# Altium PCB USBHub3.2G1.PcbDoc
Units mm, origin at the board's own origin, x right, y up, seen from the top; angles counter-clockwise.
Board outline 130 x 25 mm, 2 copper layers (Top Layer, Bottom Layer), stack 1.4 mm thick; 147 components, 69 nets, 513 pads, 0 vias.
Unrouted connection lines stored in the file: 357.
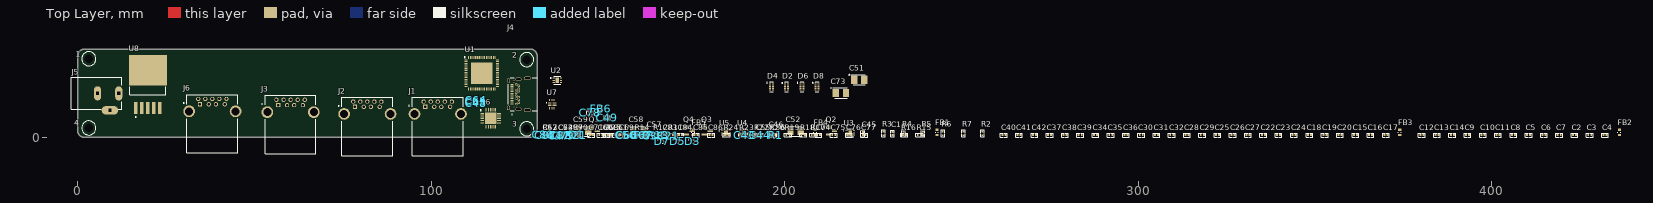
[diagram p0: Top Layer view]
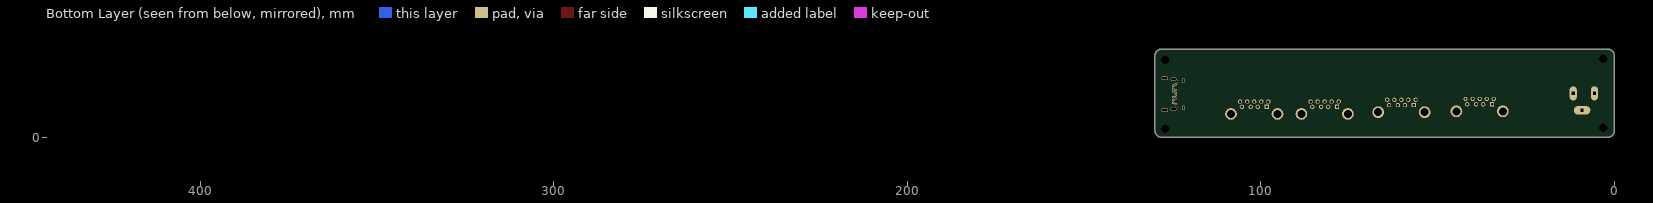
[diagram p1: Bottom Layer view, seen from below]

## Layer stack, top to bottom
Top Solder: solder mask 0.0254, SM-002, Dk 4
Top Layer: signal copper 0.035
Dielectric 1: dielectric 1.33, FR-4, Dk 4.8
Bottom Layer: signal copper 0.035
Bottom Solder: solder mask 0.0254, SM-002, Dk 4

## Board outline
0,2 0,23 cw(c2,23) 2,25 128,25 cw(c128,23) 130,23 130,2 cw(c128,2) 128,0 2,0 cw(c2,2)

## Design rules (kind name [scope] priority, off if disabled: settings)
Clearance [All] p1: gap=0.254 ignorepadtopadclearanceinfootprint=FALSE
PolygonConnect [All] p1: connectstyle=Relief reliefconductorwidth=0.254 reliefentries=4 polygonreliefangle="90 Angle" airgapwidth=0.254
RoutingVias [All] p1: holewidth=0.711 width=1.27 viastyle="Through Hole" minholewidth=0.711 minwidth=1.27 maxholewidth=0.711 maxwidth=1.27
SolderMaskExpansion [All] p1: expansion=0.102 istentingtop=FALSE
SupplyNets "Schematic Supply Nets_10" [InNet('DN3_VBUS')] p1: voltage=0.000
SupplyNets "Schematic Supply Nets_9" [InNet('DN2_VBUS')] p2: voltage=0.000
SupplyNets "Schematic Supply Nets_8" [InNet('DN4_VBUS')] p3: voltage=0.000
SupplyNets "Schematic Supply Nets_7" [InNet('5V0_EXT')] p4: voltage=0.000
SupplyNets "Schematic Supply Nets_6" [InNet('5V0')] p5: voltage=0.000
SupplyNets "Schematic Supply Nets_5" [InNet('UPS_VBUS')] p6: voltage=0.000
SupplyNets "Schematic Supply Nets_4" [InNet('DN1_VBUS')] p7: voltage=0.000
SupplyNets "Schematic Supply Nets_3" [InNet('3V3')] p8: voltage=0.000
SupplyNets "Schematic Supply Nets_2" [InNet('1V1')] p9: voltage=0.000
SupplyNets "Schematic Supply Nets_1" [InNet('GND')] p10: voltage=0.000
SupplyNets "Schematic Supply Nets" [InNet('SGND')] p11: voltage=0.000
Width [All] p1: maxlimit=0.254 minlimit=0.254 preferedwidth=0.254
30 further rules are at their usual default settings.

## Classes and differential pairs
component class Schematic: 2 3 4 C1 C39 C40 C41 C42 C43 C44 C45 C46 C47 C48 C49 C50 C51 C52 C53 C54 C55 C56 C57 C58 C59 C60 C61 C62 C63 C64 C65 C66 C67 C68 C69 C70 C71 C72 C73 C74 C75 C76 C77 C78 C79 C80 C81 C82 C83 C84 C85 C86 D1 D2 D3 D4 D5 D6 D7 D8 FB1 FB4 FB5 FB6 J1 J2 J3 J5 J6 Q1 Q2 Q3 Q4 R1 R6 R9 R13 R14 R15 R16 R19 R21 R22 R23 R24 R25 U1 U2 U6 U7 U8

## Components (designator, comment, footprint, x,y, rotation, side; value= is the part's Value field where it differs from the comment)
1 "Furo" FURO_M2 3.177,22.245 r0 top
2 "Furo" FURO_M2 127.054,21.997 r0 top
3 "Furo" FURO_M2 127.054,2.426 r0 top
4 "Furo" FURO_M2 3.177,2.672 r0 top
C1 "CAPNPOL" 0402 230.555,1.156 r90 top value="100 nF"
C2 "CAPNPOL" 0402 423.468,0.648 r0 top value="1 nF"
C3 "CAPNPOL" 0402 427.786,0.648 r0 top value="10 nF"
C4 "CAPNPOL" 0402 432.104,0.648 r0 top value="100 nF"
C5 "CAPNPOL" 0402 410.514,0.648 r0 top value="1 nF"
C6 "CAPNPOL" 0402 414.832,0.648 r0 top value="10 nF"
C7 "CAPNPOL" 0402 419.15,0.648 r0 top value="100 nF"
C8 "CAPNPOL" 0402 406.196,0.648 r0 top value="1 uF"
C9 "CAPNPOL" 0402 393.242,0.648 r0 top value="1 nF"
C10 "CAPNPOL" 0402 397.56,0.648 r0 top value="10 nF"
C11 "CAPNPOL" 0402 401.878,0.648 r0 top value="100 nF"
C12 "CAPNPOL" 0402 380.288,0.648 r0 top value="1 nF"
C13 "CAPNPOL" 0402 384.606,0.648 r0 top value="10 nF"
C14 "CAPNPOL" 0402 388.924,0.648 r0 top value="100 nF"
C15 "CAPNPOL" 0402 361.492,0.648 r0 top value="1 nF"
C16 "CAPNPOL" 0402 365.81,0.648 r0 top value="10 nF"
C17 "CAPNPOL" 0402 370.128,0.648 r0 top value="100 nF"
C18 "CAPNPOL" 0402 348.538,0.648 r0 top value="1 nF"
C19 "CAPNPOL" 0402 352.856,0.648 r0 top value="10 nF"
C20 "CAPNPOL" 0402 357.174,0.648 r0 top value="100 nF"
C21 "CAPNPOL" 0201 167.309,0.521 r0 top value="100 nF"
C22 "CAPNPOL" 0402 335.457,0.648 r0 top value="1 nF"
C23 "CAPNPOL" 0402 339.775,0.648 r0 top value="10 nF"
C24 "CAPNPOL" 0402 344.093,0.648 r0 top value="100 nF"
C25 "CAPNPOL" 0402 322.503,0.648 r0 top value="1 nF"
C26 "CAPNPOL" 0402 326.821,0.648 r0 top value="10 nF"
C27 "CAPNPOL" 0402 331.139,0.648 r0 top value="100 nF"
C28 "CAPNPOL" 0402 313.867,0.648 r0 top value="10 uF"
C29 "CAPNPOL" 0402 318.185,0.648 r0 top value="10 uF"
C30 "CAPNPOL" 0402 300.913,0.648 r0 top value="1 nF"
C31 "CAPNPOL" 0402 305.231,0.648 r0 top value="10 nF"
C32 "CAPNPOL" 0402 309.549,0.648 r0 top value="100 nF"
C33 "CAPNPOL" 0201 162.991,0.521 r0 top value="100 nF"
C34 "CAPNPOL" 0402 287.959,0.648 r0 top value="1 nF"
C35 "CAPNPOL" 0402 292.277,0.648 r0 top value="10 nF"
C36 "CAPNPOL" 0402 296.595,0.648 r0 top value="100 nF"
C37 "CAPNPOL" 0402 275.005,0.648 r0 top value="1 nF"
C38 "CAPNPOL" 0402 279.323,0.648 r0 top value="10 nF"
C39 "CAPNPOL" 0402 283.641,0.648 r0 top value="100 nF"
C40 "CAPNPOL" 0402 262.051,0.648 r0 top value="1 nF"
C41 "CAPNPOL" 0402 266.369,0.648 r0 top value="10 nF"
C42 "CAPNPOL" 0402 270.687,0.648 r0 top value="100 nF"
C43 "CAPNPOL" 0402 188.772,0.648 r0 top value="100 nF"
C44 "CAPNPOL" 0402 193.09,0.648 r0 top value="1 nF"
C45 "CAPNPOL" 0402 222.173,1.156 r90 top value="1 uF"
C46 "CAPNPOL" 0402 195.884,1.156 r90 top value="100 nF"
C47 "CAPNPOL" 0201 136.321,0.521 r0 top value="100 nF"
C48 "CAPNPOL" 0201 112.834,9.652 r0 top value="100 nF"
C49 "CAPNPOL" 0402 149.862,5.587 r0 top value="100 nF"
C50 "CAPNPOL" 0402 155.244,0.648 r0 top value="1 nF"
C51 "CAPPOL" TCJB157M006R0070 221.12,16.332 r0 top value="150 uF"
C52 "CAPPOL" TCJB157M006R0070 203.123,1.791 r0 top value="150 uF"
C53 "CAPNPOL" 0402 132.384,0.648 r0 top value="100 nF"
C54 "CAPNPOL" 0402 136.702,0.648 r0 top value="100 nF"
C55 "CAPNPOL" 0402 192.582,0.648 r0 top value="100 nF"
C56 "CAPNPOL" 0402 196.9,0.648 r0 top value="100 nF"
C57 "CAPNPOL" 0402 161.34,1.156 r90 top value="100 nF"
C58 "CAPPOL" TCJB157M006R0070 158.673,1.791 r0 top value="150 uF"
C59 "CAPPOL" TCJB157M006R0070 143.052,1.791 r0 top value="150 uF"
C60 "CAPNPOL" 0402 148.005,0.648 r0 top value="100 nF"
C61 "CAPNPOL" 0402 152.323,0.648 r0 top value="100 nF"
C62 "CAPNPOL" 0402 132.384,0.648 r0 top value="100 nF"
C63 "CAPNPOL" 0402 136.702,0.648 r0 top value="100 nF"
C64 "CAPNPOL" 0201 112.856,10.579 r180 top value="100 nF"
C65 "CAPNPOL" 0201 112.856,10.12 r180 top value="100 nF"
C66 "CAPNPOL" 0402 155.498,0.648 r0 top value="100 nF"
C67 "CAPNPOL" 0402 159.816,0.648 r0 top value="1 nF"
C68 "CAPNPOL" 0402 149.656,0.648 r0 top value="10 uF"
C69 "CAPNPOL" 0402 153.974,0.648 r0 top value="10 uF"
C70 "CAPNPOL" 0402 141.02,0.648 r0 top value="10 uF"
C71 "CAPNPOL" 0402 145.338,0.648 r0 top value="10 uF"
C72 "CAPNPOL" 0402 136.702,0.648 r0 top value="10 uF"
C73 "CAPPOL" TCJB157M006R0070 215.93,12.567 r0 top value="150 uF"
C74 "CAPNPOL" 0402 209.6,0.648 r0 top value="100 nF"
C75 "CAPNPOL" 0402 213.918,0.648 r0 top value="100 nF"
C76 "CAPNPOL" 0402 218.236,0.648 r0 top value="100 nF"
C77 "CAPNPOL" 0402 222.554,0.648 r0 top value="100 nF"
C78 "CAPNPOL" 0402 145.04,7.01 r0 top value="100 nF"
C79 "CAPNPOL" 0201 137.591,0.521 r0 top value="100 nF"
C80 "CAPNPOL" 0201 131.749,0.775 r90 top value="100 nF"
C81 "CAPNPOL" 0402 132.384,0.648 r0 top value="100 nF"
C82 "CAPNPOL" 0402 136.702,0.648 r0 top value="1 nF"
C83 "CAPNPOL" 0402 166.293,0.648 r0 top value="100 nF"
C84 "CAPNPOL" 0402 170.611,0.648 r0 top value="100 nF"
C85 "CAPNPOL" 0402 174.929,0.648 r0 top value="100 nF"
C86 "CAPNPOL" 0402 179.247,0.648 r0 top value="100 nF"
D1 "TPD2EUSB30DRTR" DRT_(R-PDSO-N3) 141.274,0.775 r0 top
D2 "ESD204DQAR" DQA0010A 200.583,14.364 r0 top
D3 "TPD2EUSB30DRTR" DRT_(R-PDSO-N3) 174.04,-1.13 r0 top
D4 "ESD204DQAR" DQA0010A 196.265,14.364 r0 top
D5 "TPD2EUSB30DRTR" DRT_(R-PDSO-N3) 169.722,-1.13 r0 top
D6 "ESD204DQAR" DQA0010A 204.901,14.364 r0 top
D7 "TPD2EUSB30DRTR" DRT_(R-PDSO-N3) 165.404,-1.13 r0 top
D8 "ESD204DQAR" DQA0010A 209.219,14.364 r0 top
FB1 "FerriteBead" FB0603 243.128,1.41 r90 top
FB2 "FerriteBead" FB0603 436.168,1.41 r90 top
FB3 "FerriteBead" FB0603 374.065,1.41 r90 top
FB4 "FerriteBead" FB0603 208.711,1.41 r90 top
FB5 "FerriteBead" FB0603 174.167,1.41 r90 top
FB6 "FerriteBead" FB0603 148.016,8.149 r90 top
J1 "USB1135-15-9-L-B" USB1135-15-9-L-B 101.894,6.642 r0 top
J2 "USB1135-15-9-L-B" USB1135-15-9-L-B 81.977,6.642 r0 top
J3 "USB1135-15-9-L-B" USB1135-15-9-L-B 60.263,7.147 r0 top
J4 "2338792-1" 2338792-1 129.979,12.218 r90 top
J5 "DC-005" DC-005 9.154,12.459 r0 top
J6 "USB1135-15-9-L-B" USB1135-15-9-L-B 38.131,7.377 r0 top
Q1 "PowerMOSFET-P" SOT-23 146.227,1.791 r0 top
Q2 "PowerMOSFET-P" SOT-23 213.283,1.791 r0 top
Q3 "PowerMOSFET-P" SOT-23 178.104,1.791 r0 top
Q4 "PowerMOSFET-P" SOT-23 173.024,1.791 r0 top
R1 "Resistor" R0402 197.535,0.648 r0 top value="1 MOhm"
R2 "Resistor" R0402 255.955,1.156 r90 top value="1 kOhms"
R3 "Resistor" R0402 228.015,1.156 r90 top value="9.53 kOhms"
R4 "Resistor" R0402 233.603,1.156 r90 top value="1 kOhms"
R5 "Resistor" R0402 239.191,1.156 r90 top value="1 kOhms"
R6 "Resistor" R0402 244.779,1.156 r90 top value="1 kOhms"
R7 "Resistor" R0402 250.621,1.156 r90 top value="1 kOhms"
R8 "Resistor" R0402 159.689,0.648 r0 top value="1 MOhm"
R9 "Resistor" R0402 141.02,0.648 r0 top value="15 kOhms"
R10 "Resistor" R0402 208.203,0.648 r0 top value="15 kOhms"
R11 "Resistor" R0402 167.944,0.648 r0 top value="15 kOhms"
R12 "Resistor" R0402 163.626,0.648 r0 top value="15 kOhms"
R13 "Resistor" R0402 164.261,0.648 r0 top value="1 MOhm"
R14 "Resistor" R0402 158.419,0.648 r0 top value="1.87 kOhms"
R15 "Resistor" R0402 238.175,0.648 r0 top value="25.5 kOhms"
R16 "Resistor" R0402 233.857,0.648 r0 top value="44.8 kOhms"
R17 "Resistor" R0402 132.384,0.648 r0 top value="4.99 kOhms"
R18 "Resistor" R0402 205.282,0.648 r0 top value="15 kOhms"
R19 "Resistor" R0402 200.964,0.648 r0 top value="10 kOhms"
R20 "Resistor" R0402 196.646,0.648 r0 top value="35 kOhms"
R21 "Resistor" R0402 141.02,0.648 r0 top value="1 MOhm"
R22 "Resistor" R0402 192.328,0.648 r0 top value="44.8 kOhms"
R23 "Resistor" R0402 188.01,0.648 r0 top value="18 kOhms"
R24 "Resistor" R0402 183.692,0.648 r0 top value="15 kOhms"
R25 "Resistor" R0402 150.418,0.648 r0 top value="10 kOhms"
U1 "TUSB8042ARGCT" RGC0064G 114.391,18.174 r0 top
U2 "TPS2553DRVR" DRV0006A 135.754,16.144 r0 top
U3 "TPS2553DRVR" DRV0006A 218.617,1.283 r0 top
U4 "TPS2553DRVR" DRV0006A 188.518,1.283 r0 top
U5 "TPS2553DRVR" DRV0006A 183.438,1.283 r0 top
U6 "TPS74801RGWRM3" RGW0020A 116.875,5.415 r0 top
U7 "TPS2121RUXT" RUX0012A 134.239,9.398 r0 top
U8 "TPS7A4533KTTR" R-PSFM-G5 19.88,18.989 r90 top

## Footprints (in the part's own frame and the unit in brackets; to place one, negate y for a bottom-side part, rotate by r counter-clockwise, add the part's x,y. Pads: shape width x height; smd on the part's side, far side on the other; paste and mask are expansions set on the pad)
0201 [mm]
  rect 0.22x0.23 smd mask+0.038: 1(-0.185,0) 2(0.185,0)
  body extent -0.13,-0.06 0.13,0.06, height 0.14
0402 [mm]
  rect 0.54x0.6 smd: 1(-0.43,0) 2(0.43,0)
  silkscreen extent -0.96,-0.55 0.94,0.56, body extent -0.5,-0.25 0.5,0.25, height 0.6
2338792-1 [mm]
  rect 0.3x0.9 smd: A1(-2.75,7.075) A2(-2.25,7.075) A3(-1.75,7.075) A4(-1.25,7.075) A5(-0.75,7.075) A6(-0.25,7.075) A7(0.25,7.075) A8(0.75,7.075) A9(1.25,7.075) A10(1.75,7.075) A11(2.25,7.075) A12(2.75,7.075)
  round 0.65 hole 0.4: B1(2.8,5.855) B2(2.4,5.155) B3(1.6,5.155) B4(1.2,5.855) B5(0.8,5.155) B6(0.4,5.855) B7(-0.4,5.855) B8(-0.8,5.155) B9(-1.2,5.855) B10(-1.6,5.155) B11(-2.4,5.155) B12(-2.8,5.855)
  oval 0.95x1.95 hole 0.55 slot 1.55 at 90 deg: G1(-4.5,2.74) G6(4.5,2.74)
  oval 1.05x1.65 hole 0.65 slot 1.25 at 90 deg: G2(-4.22,5.255) G5(4.22,5.255)
  oval 1.2x0.85 hole 0.45 slot 0.8 at 0 deg: G3(-3.845,8.055) G4(3.845,8.055)
  round 0.68 hole 0.68 unplated: ""(-3.6,6.505) ""(3.6,6.505)
  silkscreen extent -5.85,0 4.62,8.15, body extent -4.62,-0.94 4.62,8.16, height 3.36
DC-005 [mm]
  oval 4.7x2.35 hole 0.8 square: 2(0,-4.8)
  oval 2x4 hole 0.8 square: 3(-3.5,0) 4(2.5,0)
  silkscreen extent -11,-4.5 3.3,4.5, body extent -11.05,-4.9 3.25,4.5, height 11
DQA0010A [mm]
  rrect5% 0.565x0.2 smd: 1(-0.417,1) 2(-0.417,0.5) 4(-0.417,-0.5) 5(-0.417,-1) 6(0.417,-1) 7(0.417,-0.5) 9(0.417,0.5) 10(0.417,1)
  rrect5% 0.565x0.4 smd paste-1: 3(-0.417,0) 8(0.417,0)
  silkscreen extent -1.32,-1.42 0.5,1.42, body extent -0.5,-1.25 0.5,1.25, height 0.55
DRT_(R-PDSO-N3) [mm]
  rrect25% 0.46x0.2 smd: 1(-0.52,0.35) 2(-0.52,-0.35) 3(0.52,0)
  silkscreen extent -1.35,-0.5 0.4,0.65, body extent -0.5,-0.5 0.5,0.5, height 0.5
DRV0006A [mm]
  rect 0.66x0.32 smd: 1(-1.025,0.65) 2(-1.025,0) 3(-1.025,-0.65) 4(1.025,-0.65) 5(1.025,0) 6(1.025,0.65)
  rect 1x1.6 smd paste-2: 7(0,0)
  silkscreen extent -2.01,-1.13 1,1.13, body extent -1,-1 1,1, height 0.8
FB0603 [mm]
  rect 0.65x0.9 smd: 1(-0.725,0) 2(0.725,0)
  silkscreen extent -0.08,-0.4 0.08,0.4, body extent -0.8,-0.4 0.8,0.4, height 0.81
FURO_M2 [mm]
  round 0 hole 2.4 unplated mask+0: 4(0,0)
  silkscreen extent -2,-2 2,2
R0402 [mm]
  rect 0.475x0.5 smd: 1(-0.512,0) 2(0.512,0)
  silkscreen extent -1.01,-0.51 1.02,0.51, body extent -0.5,-0.25 0.5,0.25, height 0.35
R-PSFM-G5 [mm]
  rect 3.4x1 smd paste-5: 1(-10.6,3.4) 2(-10.6,1.7) 3(-10.6,0) 4(-10.6,-1.7) 5(-10.6,-3.4)
  rect 8.6x10.7 smd paste-5: 6(0,0)
  silkscreen extent -13.3,-5.08 -4.62,5.08, body extent -11.17,-5.08 3.18,5.08, height 4.66
RGC0064G [mm]
  rect 0.85x0.3 smd: 1(-4.45,3.75) 2(-4.45,3.25) 3(-4.45,2.75) 4(-4.45,2.25) 5(-4.45,1.75) 6(-4.45,1.25) 7(-4.45,0.75) 8(-4.45,0.25) 9(-4.45,-0.25) 10(-4.45,-0.75) 11(-4.45,-1.25) 12(-4.45,-1.75) 13(-4.45,-2.25) 14(-4.45,-2.75) 15(-4.45,-3.25) 16(-4.45,-3.75) 33(4.45,-3.75) 34(4.45,-3.25) 35(4.45,-2.75) 36(4.45,-2.25) 37(4.45,-1.75) 38(4.45,-1.25) 39(4.45,-0.75) 40(4.45,-0.25) 41(4.45,0.25) 42(4.45,0.75) 43(4.45,1.25) 44(4.45,1.75) 45(4.45,2.25) 46(4.45,2.75) 47(4.45,3.25) 48(4.45,3.75)
  rect 0.3x0.85 smd: 17(-3.75,-4.45) 18(-3.25,-4.45) 19(-2.75,-4.45) 20(-2.25,-4.45) 21(-1.75,-4.45) 22(-1.25,-4.45) 23(-0.75,-4.45) 24(-0.25,-4.45) 25(0.25,-4.45) 26(0.75,-4.45) 27(1.25,-4.45) 28(1.75,-4.45) 29(2.25,-4.45) 30(2.75,-4.45) 31(3.25,-4.45) 32(3.75,-4.45) 49(3.75,4.45) 50(3.25,4.45) 51(2.75,4.45) 52(2.25,4.45) 53(1.75,4.45) 54(1.25,4.45) 55(0.75,4.45) 56(0.25,4.45) 57(-0.25,4.45) 58(-0.75,4.45) 59(-1.25,4.45) 60(-1.75,4.45) 61(-2.25,4.45) 62(-2.75,4.45) 63(-3.25,4.45) 64(-3.75,4.45)
  rect 6.05x6.05 smd: 65(0,0)
  silkscreen extent -5,4.38 -4.75,4.62, body extent -4.5,-4.5 4.5,4.5, height 1
RGW0020A [mm]
  rect 1x0.35 smd: 1(-2.35,1.3) 2(-2.35,0.65) 3(-2.35,0) 4(-2.35,-0.65) 5(-2.35,-1.3) 11(2.35,-1.3) 12(2.35,-0.65) 13(2.35,0) 14(2.35,0.65) 15(2.35,1.3)
  rect 0.35x1 smd: 6(-1.3,-2.35) 7(-0.65,-2.35) 8(0,-2.35) 9(0.65,-2.35) 10(1.3,-2.35) 16(1.3,2.35) 17(0.65,2.35) 18(0,2.35) 19(-0.65,2.35) 20(-1.3,2.35)
  rect 3.25x3.25 smd: 21(0,0)
  silkscreen extent -3.01,2.11 -2.69,2.44, body extent -2.5,-2.5 2.5,2.5, height 1
RUX0012A [mm]
  rect 1.05x0.4 smd: 1(-0.675,0.35) 2(-0.675,-0.35) 7(0.675,-0.35) 8(0.675,0.35)
  rect 0.2x0.6 smd: 3(-0.75,-1.15) 4(-0.25,-1.15) 5(0.25,-1.15) 6(0.75,-1.15) 9(0.75,1.15) 10(0.25,1.15) 11(-0.25,1.15) 12(-0.75,1.15)
  silkscreen extent -1.6,0.35 -1.5,0.45, body extent -1.05,-1.3 1.05,1.3, height 1
SOT-23 [mm]
  rect 1.55x0.65 smd: 1(-0.85,0.96) 2(-0.85,-0.96) 3(0.85,0)
  silkscreen extent -1.63,1.54 -0.08,1.54, body extent -1.2,-1.45 1.2,1.45, height 1.11
TCJB157M006R0070 [mm]
  rect 1.8x2.3 smd: 1(-1.45,0) 2(1.45,0)
  silkscreen extent -2.92,-1.43 1.75,1.49, body extent -1.75,-1.43 1.75,1.43, height 2.1
USB1135-15-9-L-B [mm]
  rect 1.208x1.208 hole 0.7: 1(-3.5,2)
  round 1.208 hole 0.7: 2(-1,2) 3(1,2) 4(3.5,2) 5(4,3.5) 6(2,3.5) 7(0,3.5) 8(-2,3.5) 9(-4,3.5)
  round 3.316 hole 2.3: S1(-6.57,0) S2(6.57,0)
  silkscreen extent -8.2,-11.78 7.17,4.72, body extent -7.74,-11.78 7.73,4.72, height 7.58

## Part data
1 2 3 4: library part FURO_M2, "Furo para parafuso M2", Nome=FURO_M2, Part Number=FURO_M2, Sub-Tipo=Furo
C1 C4 C7 C11 C14 C17 C20 C24 C27 C32 C36 C39 C42 C43 C46 C49 C53 C54 C55 C56 C57 C60 C61 C62 C63 C66 C74 C75 C76 C77 C78 C81 C83 C84 C85 C86: library part GRT155R71C104KE01J, "Multilayer Ceramic Capacitors MLCC - SMD/SMT 0.1 uF 16 VDC 10% 0402 X7R AEC-Q200", Manufacter="Murata Electronics", Package=0402, Supplier Part Number 1=81-GRT155R71C104KE1J, Montagem=SMD, Nome=GRT155R71C104KE01J, Part Number=GRT155R71C104KE01J, Polarizado/Não polarizado="Não polarizado", Sub-Tipo=Ceramico, Supplier 1=Mouser, Supplier 2=Digikey, Supplier 3=LCSC, Supplier Part Number 2=490-GRT155R71C104KE01JCT-ND, Supplier Part Number 3=C3841254
C2 C5 C9 C12 C15 C18 C22 C25 C30 C34 C37 C40 C44 C50 C67 C82: library part GCM155R72A102KA37J, "Multilayer Ceramic Capacitors MLCC - SMD/SMT 1000 pF 100 VDC 10% 0402 X7R AEC-Q200", Manufacter="Murata Electronics", Package=0402, Supplier Part Number 1=81-GCM155R72A102KA7J, Montagem=SMD, Nome=GCM155R72A102KA37J, Part Number=GCM155R72A102KA37J, Polarizado/Não polarizado="Não polarizado", Sub-Tipo=Ceramico, Supplier 1=Mouser, Supplier 2=Digikey, Supplier 3=LCSC, Supplier Part Number 2=490-GRT155R71C104KE01JCT-ND, Supplier Part Number 3=C3841254
C3 C6 C10 C13 C16 C19 C23 C26 C31 C35 C38 C41: library part GRT155R71E103KE01D, "Multilayer Ceramic Capacitors MLCC - SMD/SMT 0.01 uF 25 VDC 10% 0402 X7R AEC-Q200", Manufacter="Murata Electronics", Package=0402, Supplier Part Number 1=81-GRT155R71E103KE1D, Montagem=SMD, Nome=GRT155R71E103KE01D, Part Number=GRT155R71E103KE01D, Polarizado/Não polarizado="Não polarizado", Sub-Tipo=Ceramico, Supplier 1=Mouser, Supplier 2=Digikey, Supplier 3=LCSC, Supplier Part Number 2=490-GRT155R71E103KE01DCT-ND, Supplier Part Number 3=C6565728
C8 C45: library part GRM155C81A105MA12D, "Multilayer Ceramic Capacitors MLCC - SMD/SMT 1 uF 10 VDC 20% 0402 X6S", Manufacter="Murata Electronics", Package=0402, Supplier Part Number 1=81-GRM155C81A105MA2D, Montagem=SMD, Nome=GRM155C81A105MA12D, Part Number=GRM155C81A105MA12D, Polarizado/Não polarizado="Não polarizado", Sub-Tipo=Ceramico, Supplier 1=Mouser, Supplier 2=Digikey, Supplier 3=LCSC, Supplier Part Number 2=490-GRM155C81A105MA12DCT-ND, Supplier Part Number 3=C2190031
C21 C33 C47 C48 C64 C65 C79 C80: library part GRT033R61C104KE01D, "Multilayer Ceramic Capacitors MLCC - SMD/SMT 0.1 uF 16 VDC 10% 0201 X5R AEC-Q200", Manufacter="Murata Electronics", Package=0201, Supplier Part Number 1=81-GRT033R61C104KE1D, Montagem=SMD, Nome=GRT033R61C104KE01D, Part Number=GRT033R61C104KE01D, Polarizado/Não polarizado="Não polarizado", Sub-Tipo=Ceramico, Supplier 1=Mouser, Supplier 2=Digikey, Supplier 3=LCSC, Supplier Part Number 2=490-GRT033R61C104KE01DCT-ND, Supplier Part Number 3=C6955435
C28 C29 C68 C69 C70 C71 C72: library part GRM155R61A106ME11D, "Multilayer Ceramic Capacitors MLCC - SMD/SMT 10 uF 10 VDC 20% 0402 X5R", Manufacter="Murata Electronics", Package=0402, Supplier Part Number 1=81-GRM155R61A106ME1D, Montagem=SMD, Nome=GRM155R61A106ME11D, Part Number=GRM155R61A106ME11D, Polarizado/Não polarizado="Não polarizado", Sub-Tipo=Ceramico, Supplier 1=Mouser, Supplier 2=Digikey, Supplier 3=LCSC, Supplier Part Number 2=490-GRM155R61A106ME11DCT-ND, Supplier Part Number 3=C408132
C51 C52 C58 C59 C73: library part TCJB157M006R0070, "Tantalum Capacitors - Polymer 6.3V 150uF 20% 1210 ESR=70mOhm", Manufacter="KYOCERA AVX", Supplier Part Number 1=581-TCJB157M006R0070, Montagem=SMD, Nome=TCJB157M006R0070, Package=TCJB157M006R0070, Part Number=TCJB157M006R0070, Polarizado/Não polarizado=Polarizado, Sub-Tipo=Tântalo, Supplier 1=Mouser, Supplier 2=Digikey, Supplier 3=LCSC, Supplier Part Number 2=478-4921-1-ND, Supplier Part Number 3=C24904
D1 D3 D5 D7: "ESD Protection Diodes / TVS Diodes 2Ch ESD Solution", Breakdown Voltage="7 V", Manufacter="Texas Instruments", Package=DRT_(R-PDSO-N3), Peak Pulse Current="5 A", Peak Pulse Power Dissipation="45 W", Supplier Part Number 1=595-TPD2EUSB30DRTR, Bidirecional/Unidirecional=TPD2EUSB30DRTR, Montagem=SMD, Nome=TPD2EUSB30DRTR, Part Number=TPD2EUSB30DRTR, Supplier 1=Mouser, Supplier 2=Digikey, Supplier 3=LCSC, Supplier Part Number 2=296-25509-1-ND, Supplier Part Number 3=TPD2EUSB30DRTR
D2 D4 D6 D8: "ESD Protection Diodes / TVS Diodes Quad 0.55-pF +/-3.6 -V +/-30-kV ESD pro", Breakdown Voltage="7.9 V", Manufacter="Texas Instruments", Package=DQA0010A, Peak Pulse Current="5.5 A", Peak Pulse Power Dissipation="50 W", Supplier Part Number 1=595-ESD204DQAR, Bidirecional/Unidirecional=ESD204DQAR, Montagem=SMD, Nome=ESD204DQAR, Part Number=ESD204DQAR, Supplier 1=Mouser, Supplier 2=Digikey, Supplier 3=LCSC, Supplier Part Number 2=296-49504-1-ND, Supplier Part Number 3=C553132
FB1 FB2 FB3 FB4 FB5 FB6: library part BLM18KG221SH1D, "Ferrite Beads 220 OHM Alternate Sizing Guide Below", Manufacter="Murata Electronics", Package=0603, Supplier Part Number 1=81-BLM18KG221SH1D, Tolerancia=25%, Corrente Max="2.2 A", imepdancia="220 Ohms", Nome=BLM18KG221SH1D, Part Number=BLM18KG221SH1D, Supplier 1=Mouser, Supplier 2=Digikey, Supplier 3=LCSC, Supplier Part Number 2=490-13256-1-ND, Supplier Part Number 3=C527991, Tipo="Ferrite Bead"
J1 J2 J3 J6: "USB Connectors USB A 3.0 Skt RA High Life 15u\" T Hole W/Shell Stake Tray", Manufacter=GCT, Supplier Part Number 1=640-USB1135-15-9-L-B, Colunas=0, Montagem=PTH, Nome=USB1135-15-9-L-B, Part Number=USB1135-15-9-L-B, Pinos por coluna=0, Sub-Tipo=USB, Supplier 1=Mouser, Supplier 2=Digikey, Supplier 3=LCSC, Supplier Part Number 2=2073-USB1135-15-9-L-B-ND, Supplier Part Number 3=C5456888, Total de Pinos=11
J4: "USB Connectors USB TYPE C 3.1 CONN REV TOP MOUNT CH1.6", Manufacter="TE Connectivity", Supplier Part Number 1=571-2338792-1, Colunas=0, Montagem=PTH/SMD, Nome=2338792-1, Part Number=2338792-1, Pinos por coluna=0, Sub-Tipo=USB, Supplier 1=Mouser, Supplier 2=Digikey, Supplier 3=LCSC, Supplier Part Number 2=17-2338792-1CT-ND, Supplier Part Number 3=C6077276, Total de Pinos=24
J5: "DC Jack", Manufacter=Generic, Colunas=0, Montagem=PTH, Nome=DC-005, Part Number=DC-005, Pinos por coluna=3, Sub-Tipo="DC Jack", Total de Pinos=3
Q1 Q2 Q3 Q4: library part IRLML2244TRPBF, "MOSFETs MOSFT PCh -20V -4.3A 54mOhm -2.5V cpbl", Manufacter=Infineon, Package=SOT-23, Supplier Part Number 1=942-IRLML2244TRPBF, Canal=P, Corrente Max="4,3 A", Montagem=SMD, Nome=IRLML2244TRPBF, Part Number=IRLML2244TRPBF, Sub-Tipo="Power MOSFET-P", Supplier 1=Mouser, Supplier 2=Digikey, Supplier 3=LCSC, Supplier Part Number 2=IRLML2244TRPBFCT-ND, Supplier Part Number 3=C169763
R1 R8 R13 R21: library part CRCW04021M00FKEE, "Thick Film Resistors 1M OHM 1%", Manufacter=Vishay, Package=0402, Supplier Part Number 1=71-CRCW04021M00FKEE, Tolerancia=1%, Montagem=SMD, Nome=CRCW04021M00FKEE, Part Number=CRCW04021M00FKEE, Potencia="62.5 mW", Simbolo=Resistor, Supplier 1=Mouser, Supplier 2=Digikey, Supplier 3=LCSC, Supplier Part Number 2=541-CRCW04021M00FKEECT-ND, Supplier Part Number 3=C4207375
R2 R4 R5 R6 R7: library part AC0402JR-7W1KL, "Thick Film Resistors 1 kOhms 1/8 W 100 V 5 % 0402 100 PPM / C - 55 C / + 155 C AEC-Q200", Manufacter=YAGEO, Package=0402, Supplier Part Number 1=603-AC0402JR-7W1KL, Tolerancia="1 %", Montagem=SMD, Nome=AC0402JR-7W1KL, Part Number=AC0402JR-7W1KL, Potencia="125 mW", Simbolo=Resistor, Supplier 1=Mouser, Supplier 2=Digikey, Supplier 3=LCSC, Supplier Part Number 2=13-AC0402JR-7W1KLCT-ND, Supplier Part Number 3=C6491893
R3: library part RC0402FR-079K53L, "Resistores de Filme Fino - SMD 9.53 kOhms 62.5mW 04 02 1%", Manufacter=YAGEO, Package=0402, Supplier Part Number 1=603-RC0402FR-079K53L, Tolerancia=1%, Montagem=SMD, Nome=RC0402FR-079K53L, Part Number=RC0402FR-079K53L, Potencia=62.5mW, Simbolo=Resistor, Supplier 1=Mouser, Supplier 2=Digikey, Supplier 3=LCSC, Supplier Part Number 2=311-9.53KLRCT-ND, Supplier Part Number 3=C295883
R9 R10 R11 R12 R18 R24: library part AC0402FR-1315KL, "Thick Film Resistors 15 kOhms 1/16 W 50 V 1 % 0402 100 PPM / C - 55 C / + 155 C AEC-Q200", Manufacter=YAGEO, Package=0402, Supplier Part Number 1=603-AC0402FR-1315KL, Tolerancia=1%, Montagem=SMD, Nome=AC0402FR-1315KL, Part Number=AC0402FR-1315KL, Potencia="62.5 mW", Simbolo=Resistor, Supplier 1=Mouser, Supplier 2=Digikey, Supplier 3=LCSC, Supplier Part Number 2=13-AC0402FR-1315KLCT-ND, Supplier Part Number 3=C169763
R14: library part AC0402FR-071K87L, "Thick Film Resistors 1.87 kOhms 1/16 W 50 V 1% 0402 100 PPM / C - 55 C + 155 C AEC-Q200", Manufacter=YAGEO, Package=0402, Supplier Part Number 1=603-AC0402FR-071K87L, Tolerancia=1%, Montagem=SMD, Nome=AC0402FR-071K87L, Part Number=AC0402FR-071K87L, Potencia="62.5 mW", Simbolo=Resistor, Supplier 1=Mouser, Supplier 2=Digikey, Supplier 3=LCSC, Supplier Part Number 2=YAG5270CT-ND, Supplier Part Number 3=C705744
R15: library part ERA-2AEB2552X, "Thin Film Resistors 0402 25.5Kohm .1% AEC-Q200", Manufacter=Panasonic, Package=0402, Supplier Part Number 1=667-ERA-2AEB2552X, Tolerancia="0.1 %", Montagem=SMD, Nome=ERA-2AEB2552X, Part Number=ERA-2AEB2552X, Potencia="62.5 mW", Simbolo=Resistor, Supplier 1=Mouser, Supplier 2=Digikey, Supplier 3=LCSC, Supplier Part Number 2=P25.5KDCCT-ND, Supplier Part Number 3=C2074651
R16 R22: library part RT0402BRD0744K8L, "Thin Film Resistors 44.8K ohm .1% 25 ppm High-Precision", Manufacter=YAGEO, Package=0402, Supplier Part Number 1=603-RT0402BRD0744K8L, Tolerancia="0.1 %", Montagem=SMD, Nome=RT0402BRD0744K8L, Part Number=RT0402BRD0744K8L, Potencia="62.5 mW", Simbolo=Resistor, Supplier 1=Mouser, Supplier 2=Digikey, Supplier 3=LCSC, Supplier Part Number 2=13-RT0402BRD0744K8LCT-ND, Supplier Part Number 3=C852792
R17: library part RT0402BRD074K99L, "Thin Film Resistors 1/16W 4.99K ohm .1% 25ppm", Manufacter=YAGEO, Package=0402, Supplier Part Number 1=603-RT0402BRD074K99L, Tolerancia=1%, Montagem=SMD, Nome=RT0402BRD074K99L, Part Number=RT0402BRD074K99L, Potencia="62.5 mW", Simbolo=Resistor, Supplier 1=Mouser, Supplier 2=Digikey, Supplier 3=LCSC, Supplier Part Number 2=YAG1447CT-ND, Supplier Part Number 3=C852823
R19 R25: library part RT0402FRE1310KL, "Thin Film Resistors 10K ohm 1% 50 ppm Thin Film", Manufacter=YAGEO, Package=0402, Supplier Part Number 1=603-RT0402FRE1310KL, Tolerancia="1 %", Montagem=SMD, Nome=RT0402FRE1310KL, Part Number=RT0402FRE1310KL, Potencia="62.5 mW", Simbolo=Resistor, Supplier 1=Mouser, Supplier 2=Digikey, Supplier 3=LCSC, Supplier Part Number 2=13-RT0402FRE1310KLCT-ND, Supplier Part Number 3=C5455557
R20: library part RC0402FR-0735KL, "Thick Film Resistors - SMD General Purpose Chip Resistor 0402, 35kOhms, 1%, 1/16W", Manufacter=YAGEO, Package=0402, Supplier Part Number 1=603-RC0402FR-0735KL, Tolerancia="1 %", Montagem=SMD, Nome=RC0402FR-0735KL, Part Number=RC0402FR-0735KL, Potencia="62.5 mW", Simbolo=Resistor, Supplier 1=Mouser, Supplier 2=Digikey, Supplier 3=LCSC, Supplier Part Number 2=13-RC0402FR-0735KLCT-ND, Supplier Part Number 3=C477715
R23: library part RT0402FRE0718KL, "Thin Film Resistors 1/16W 18K ohm 1% 50ppm", Manufacter=YAGEO, Package=0402, Supplier Part Number 1=603-RT0402FRE0718KL, Tolerancia="1 %", Montagem=SMD, Nome=RT0402FRE0718KL, Part Number=RT0402FRE0718KL, Potencia="62.5 mW", Simbolo=Resistor, Supplier 1=Mouser, Supplier 2=Digikey, Supplier 3=LCSC, Supplier Part Number 2=13-RT0402FRE0718KLCT-ND, Supplier Part Number 3=C854155
U1: "USB Interface IC Four-port USB 3.2 x1 gen1 hub 64-VQFN 0 A 595-TUSB8042ARGCR", Manufacter="Texas Instruments", Package=RGC0064G, Supplier Part Number 1=595-TUSB8042ARGCT, Montagem=SMD, Nome=TUSB8042ARGCT, Part Number=TUSB8042ARGCT, Sub-Tipo="USB HUB", Supplier 1=Mouser, Supplier 2=Digikey, Supplier 3=LCSC, Supplier Part Number 2=296-TUSB8042ARGCT-ND, Supplier Part Number 3=C2678051
U2 U3 U4 U5: "Power Switch ICs - Power Distribution Adj Crnt-Ltd Pwr- Di st Sw A 595-TPS2553DRVT", Manufacter="Texas Instruments", Package=DRV0006A, Supplier Part Number 1=595-TPS2553DRVR, Montagem=SMD, Nome=TPS2553DRVR, Part Number=TPS2553DRVR, Sub-Tipo="Current Limiter", Supplier 1=Mouser, Supplier 2=Digikey, Supplier 3=LCSC, Supplier Part Number 2=296-36006-1-ND, Supplier Part Number 3=C138719
U6: "Linear Voltage Regulators 1.5-A low-VIN (0.8 V ) adjustable low-dro", Manufacter="Texas Instruments", Package=RGW0020A, Supplier Part Number 1=595-TPS74801RGWRM3, Montagem=SMD, Nome=TPS74801RGWRM3, Part Number=TPS74801RGWRM3, Sub-Tipo="Regulador LDO", Supplier 1=Mouser, Supplier 2=Digikey, Supplier Part Number 2=296-TPS74801RGWRM3CT-ND
U7: "Power Switch ICs - Power Distribution 2.7-V&nbsp;to 22-V 56-m? 4.5-A power A 595-TPS2121RUXR", Manufacter="Texas Instruments", Package=RUX0012A, Supplier Part Number 1=595-TPS2121RUXT, Montagem=SMD, Nome=TPS2121RUXT, Part Number=TPS2121RUXT, Sub-Tipo="Power MUX", Supplier 1=Mouser, Supplier 2=Digikey, Supplier 3=LCSC, Supplier Part Number 2=296-53412-1-ND, Supplier Part Number 3=C2156025
U8: "LDO Voltage Regulators Low-Noise Fast Trans -Resp 1.5A", Manufacter="Texas Instruments", Package=R-PSFM-G5, Supplier Part Number 1=595-TPS7A4533KTTR, Montagem=SMD, Nome=TPS7A4533KTTR, Part Number=TPS7A4533KTTR, Sub-Tipo="Regulador LDO", Supplier 1=Mouser, Supplier 2=Digikey, Supplier 3=LCSC, Supplier Part Number 2=296-23755-1-ND, Supplier Part Number 3=C2865625

## Nets (pads, with @x,y where several pads share a name; then routed paths per layer and width w, separated by ;. In a path a pad name is that pad's centre, name@x,y a point inside that pad or via, vN(x,y) a via of type N, cw(c..) or ccw(c..) an arc to the next point about the centre after c; other vN are vias at no path point)
1V1: C72.1 FB3.1 R14.2 U6.1 U6.18 U6.19 U6.20
3V3: C70.1 C71.1 FB2.1 R2.2 U6.5 U6.6 U6.7 U6.8 U6.10 U6.11 U8.4 U8.5
5V0: C53.1 C55.1 C60.1 C62.1 C68.1 C69.1 Q1.2 Q2.2 Q3.2 Q4.2 U2.4 U2.6 U3.4 U3.6 U4.4 U4.6 U5.4 U5.6 U7.1 U7.8 U8.1 U8.2
5V0_EXT: C73.1 C74.1 C75.1 C76.1 C77.1 J5.4 R15.2 R16.2 U7.7
DN1_VBUS: C51.1 C54.1 FB1.1 U2.1
DN2_VBUS: FB4.1
DN3_VBUS: FB5.1
DN4_VBUS: FB6.1
GND: C1.2 C2.2 C3.2 C4.2 C5.2 C6.2 C7.2 C8.2 C9.2 C10.2 C11.2 C12.2 C13.2 C14.2 C15.2 C16.2 C17.2 C18.2 C19.2 C20.2 C22.2 C23.2 C24.2 C25.2 C26.2 C27.2 C28.2 C29.2 C30.2 C31.2 C32.2 C34.2 C35.2 C36.2 C37.2 C38.2 C39.2 C40.2 C41.2 C42.2 C43.2 C44.2 C45.2 C46.2 C49.2 C50.2 C51.2 C52.2 C53.2 C54.2 C55.2 C56.2 C57.2 C58.2 C59.2 C60.2 C61.2 C62.2 C63.2 C66.2 C67.2 C68.2 C69.2 C70.2 C71.2 C72.2 C73.2 C74.2 C75.2 C76.2 C77.2 C78.2 C81.2 C82.2 C83.2 C84.2 C85.2 C86.2 D1.3 D2.3 D2.8 D3.3 D4.3 D4.8 D5.3 D6.3 D6.8 D7.3 D8.3 D8.8 J1.4 J1.7 J2.4 J2.7 J3.4 J3.7 J5.2 J5.3 J6.4 J6.7 R1.1 R3.1 R4.1 R5.1 R6.1 R7.1 R8.1 R9.1 R10.1 R11.1 R12.1 R13.1 R17.1 R18.1 R19.1 R21.1 R23.1 R24.1 R25.1 U1.65 U2.5 U2.7 U3.5 U3.7 U4.5 U4.7 U5.5 U5.7 U6.2 U6.3 U6.4 U6.12 U6.13 U6.14 U6.17 U6.21 U7.9 U7.12 U8.3 U8.6
NetC1_1: C1.1 FB1.2 J1.1
NetC2_1: C2.1 C3.1 C4.1 C5.1 C6.1 C7.1 C8.1 C9.1 C10.1 C11.1 C12.1 C13.1 C14.1 FB2.2 U1.16 U1.34 U1.52 U1.63
NetC15_1: C15.1 C16.1 C17.1 C18.1 C19.1 C20.1 C22.1 C23.1 C24.1 C25.1 C26.1 C27.1 C28.1 C29.1 C30.1 C31.1 C32.1 C34.1 C35.1 C36.1 C37.1 C38.1 C39.1 C40.1 C41.1 C42.1 FB3.2 U1.5 U1.8 U1.13 U1.21 U1.28 U1.31 U1.51 U1.57
NetC21_1: C21.1 D2.2 D2.9 U1.4
NetC21_2: C21.2 J1.8
NetC33_1: C33.1 D2.1 D2.10 U1.3
NetC33_2: C33.2 J1.9
NetC45_1: C45.1 U1.50
NetC46_1: C46.1 FB4.2 J2.1
NetC47_1: C47.1 D4.2 D4.9 U1.12
NetC47_2: C47.2 J2.8
NetC48_1: C48.1 D4.1 D4.10 U1.11
NetC48_2: C48.2 J2.9
NetC52_1: C52.1 C56.1 U3.1
NetC57_1: C57.1 FB5.2 J3.1
NetC58_1: C58.1 C61.1 U4.1
NetC59_1: C59.1 C63.1 U5.1
NetC64_1: C64.1 D6.2 D6.9 U1.20
NetC64_2: C64.2 J3.8
NetC65_1: C65.1 D6.1 D6.10 U1.19
NetC65_2: C65.2 J3.9
NetC78_1: C78.1 FB6.2 J6.1
NetC79_1: C79.1 D8.2 D8.9 U1.27
NetC79_2: C79.2 J6.8
NetC80_1: C80.1 D8.1 D8.10 U1.26
NetC80_2: C80.2 J6.9
NetD1_1: D1.1 J1.3 U1.1
NetD1_2: D1.2 J1.2 U1.2
NetD2_4: D2.4 D2.7 J1.6 U1.6
NetD2_5: D2.5 D2.6 J1.5 U1.7
NetD3_1: D3.1 J2.3 U1.9
NetD3_2: D3.2 J2.2 U1.10
NetD4_4: D4.4 D4.7 J2.6 U1.14
NetD4_5: D4.5 D4.6 J2.5 U1.15
NetD5_1: D5.1 J3.3 U1.17
NetD5_2: D5.2 J3.2 U1.18
NetD6_4: D6.4 D6.7 J3.6 U1.22
NetD6_5: D6.5 D6.6 J3.5 U1.23
NetD7_1: D7.1 J6.3 U1.24
NetD7_2: D7.2 J6.2 U1.25
NetD8_4: D8.4 D8.7 J6.6 U1.29
NetD8_5: D8.5 D8.6 J6.5 U1.30
NetQ1_3: Q1.3 R9.2 U2.2
NetQ2_3: Q2.3 R10.2 U3.2
NetQ3_3: Q3.3 R11.2 U4.2
NetQ4_3: Q4.3 R12.2 U5.2
NetR2_1: R2.1 U1.45
NetR3_2: R3.2 U1.64
NetR4_2: R4.2 U1.49
NetR5_2: R5.2 U1.41
NetR6_2: R6.2 U1.40
NetR7_2: R7.2 U1.42
NetR14_1: R14.1 R17.2 U6.16
NetR15_1: R15.1 R18.2 U7.6
NetR16_1: R16.1 R19.2 U7.5
NetR20_1: R20.1 R24.2 U7.3
NetR22_1: R22.1 R25.2 U7.4
NetR23_2: R23.2 U7.10
SGND: C43.1 C44.1 C49.1 C50.1 C66.1 C67.1 C81.1 C82.1 J1.S1 J1.S2 J2.S1 J2.S2 J3.S1 J3.S2 J6.S1 J6.S2 R1.2 R8.2 R13.2 R21.2
UPS_VBUS: C83.1 C84.1 C85.1 C86.1 R20.2 R22.2 U7.2
pads on no net: 1.4 2.4 3.4 4.4 J4. J4.A1 J4.A2 J4.A3 J4.A4 J4.A5 J4.A6 J4.A7 J4.A8 J4.A9 J4.A10 J4.A11 J4.A12 J4.B1 J4.B2 J4.B3 J4.B4 J4.B5 J4.B6 J4.B7 J4.B8 J4.B9 J4.B10 J4.B11 J4.B12 J4.G1 J4.G2 J4.G3 J4.G4 J4.G5 J4.G6 Q1.1 Q2.1 Q3.1 Q4.1 U1.32 U1.33 U1.35 U1.36 U1.37 U1.38 U1.39 U1.43 U1.44 U1.46 U1.47 U1.48 U1.53 U1.54 U1.55 U1.56 U1.58 U1.59 U1.60 U1.61 U1.62 U2.3 U3.3 U4.3 U5.3 U6.9 U6.15 U7.11

## Silkscreen, mask and mechanical layers (free items; w line width, h text height)
BoardShape:
  the board outline again, w0.254

## Text inside footprints (layer, text, board x,y; h text height)
J4: Mechanical 13 "PCB EDGE" at 129.774,17.618 h1.52 r90